# Altium PCB cube8.PcbDoc
Units mil, origin at the board's own origin, x right, y up, seen from the top; angles counter-clockwise.
Board outline 5240 x 7275 mil, 2 copper layers (Top Layer, Bottom Layer); 159 components, 180 nets, 530 pads, 5 vias.
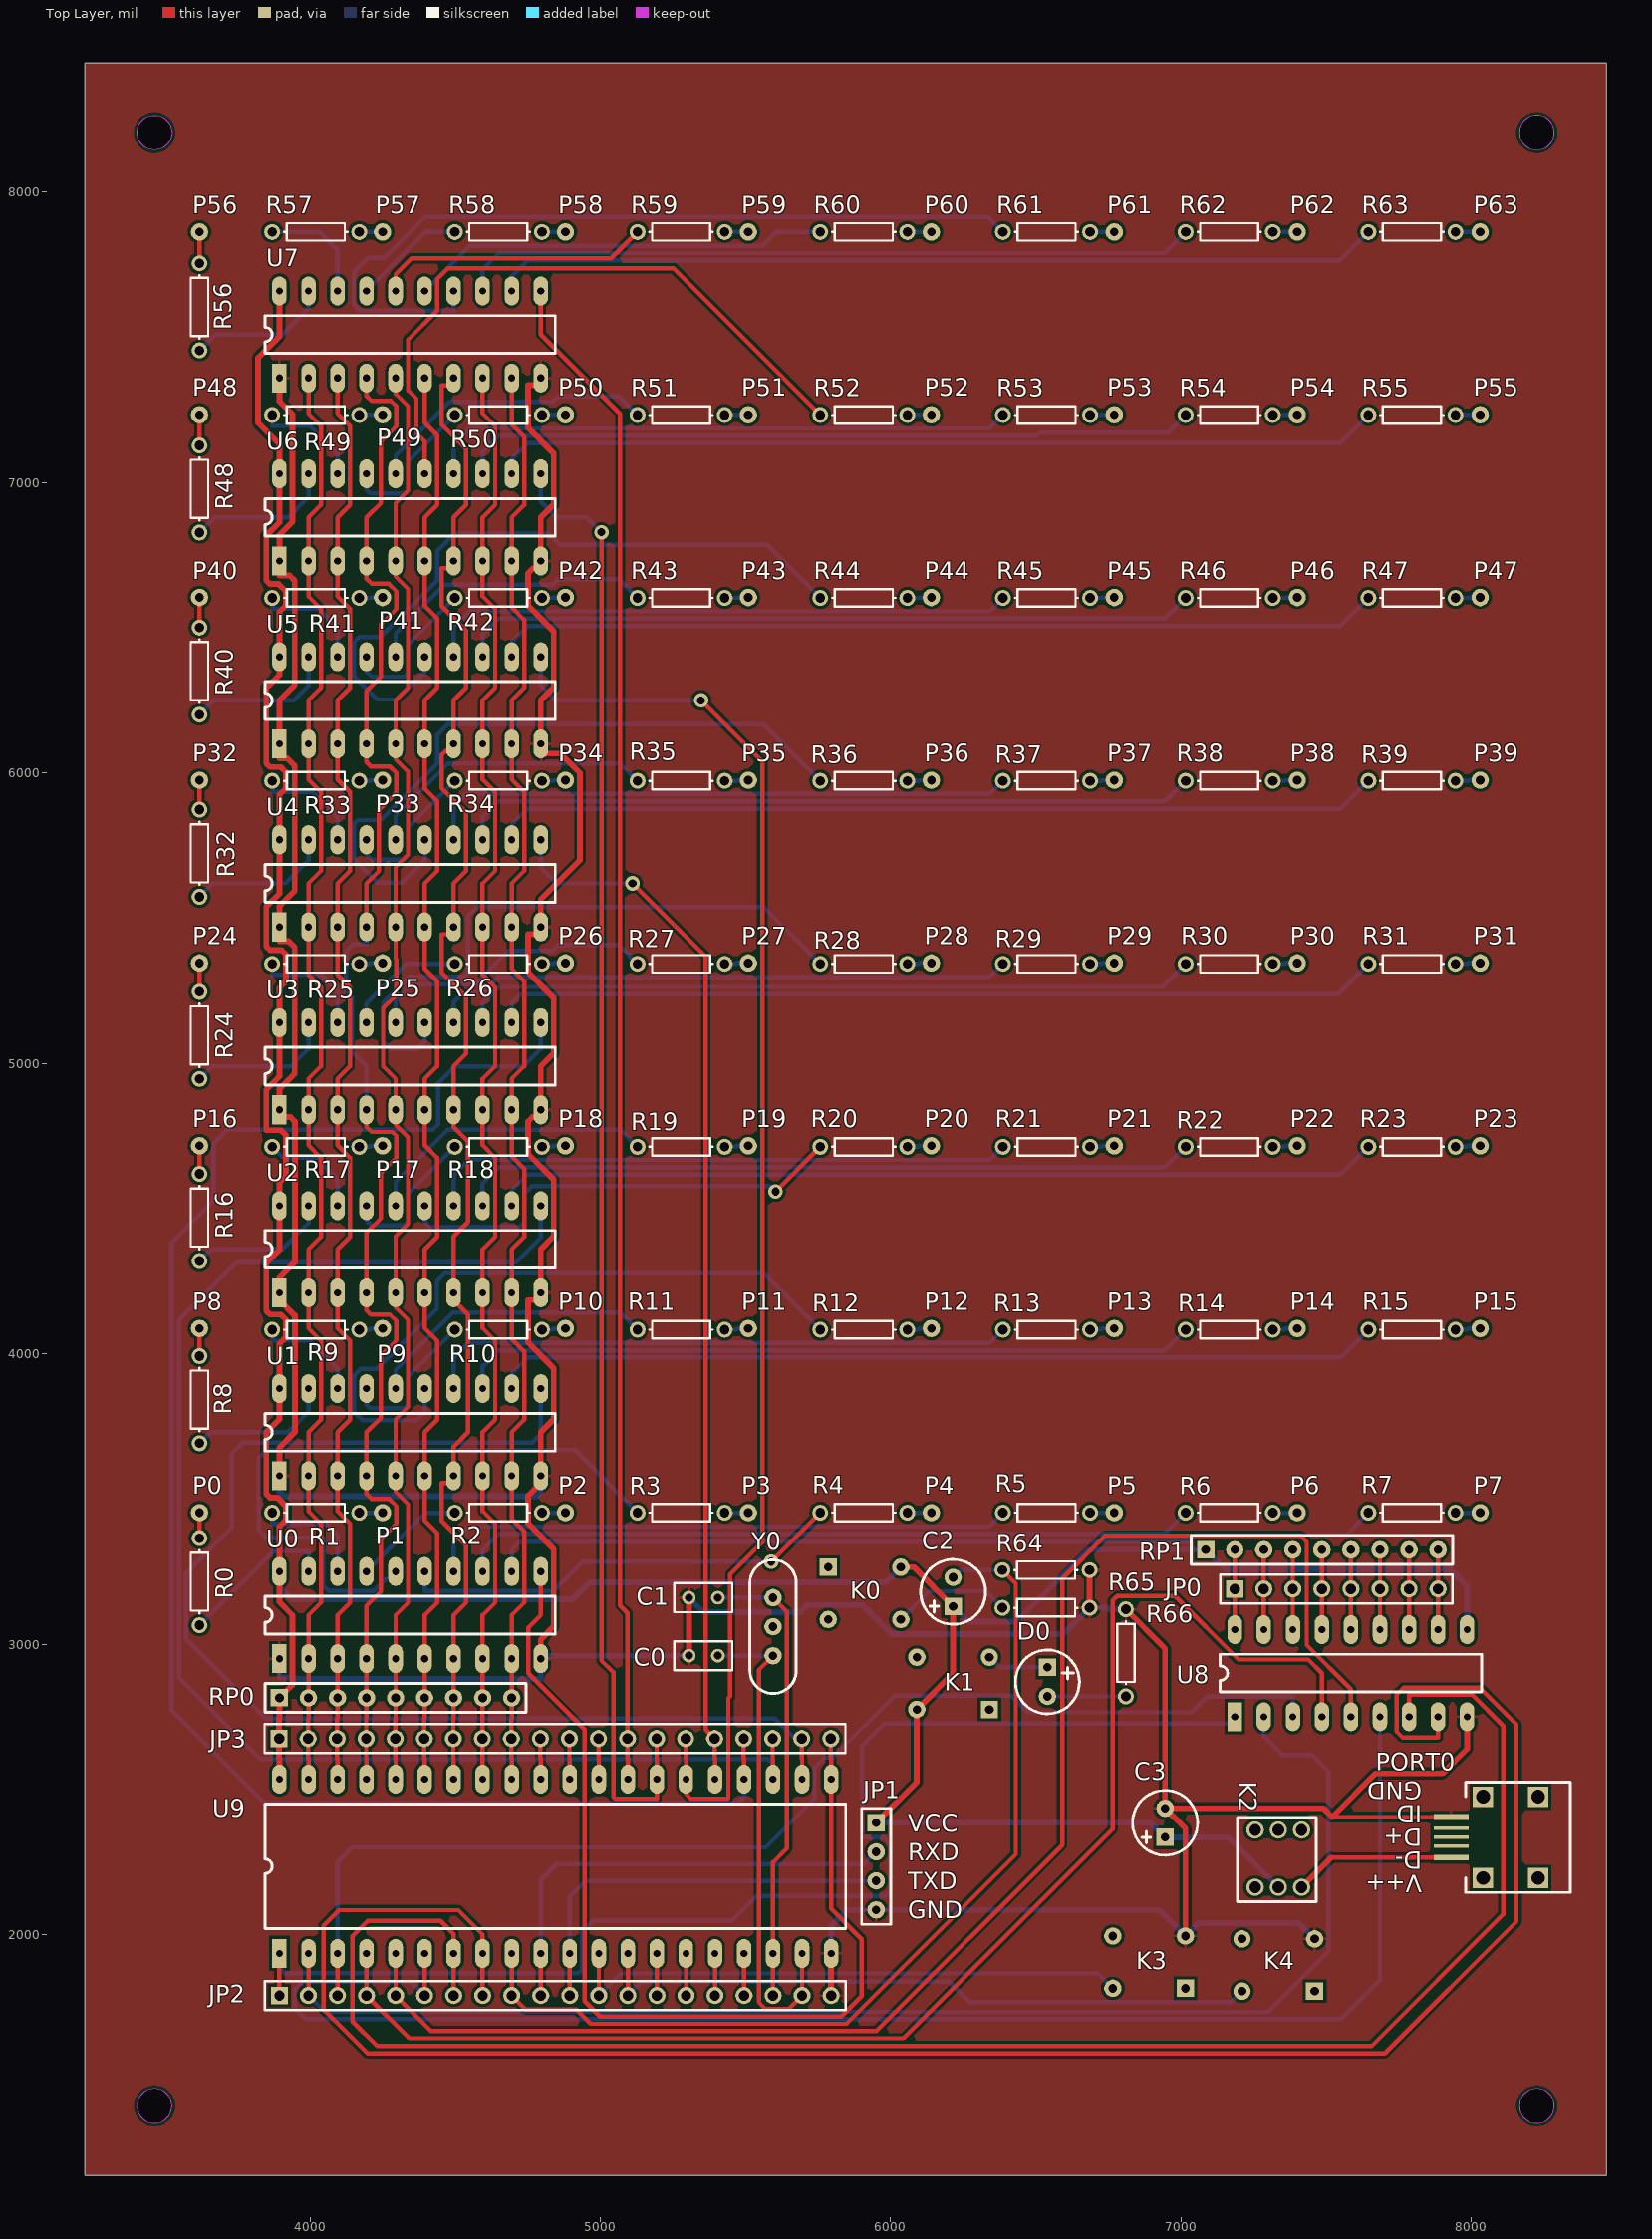
[diagram p0: Top Layer view]
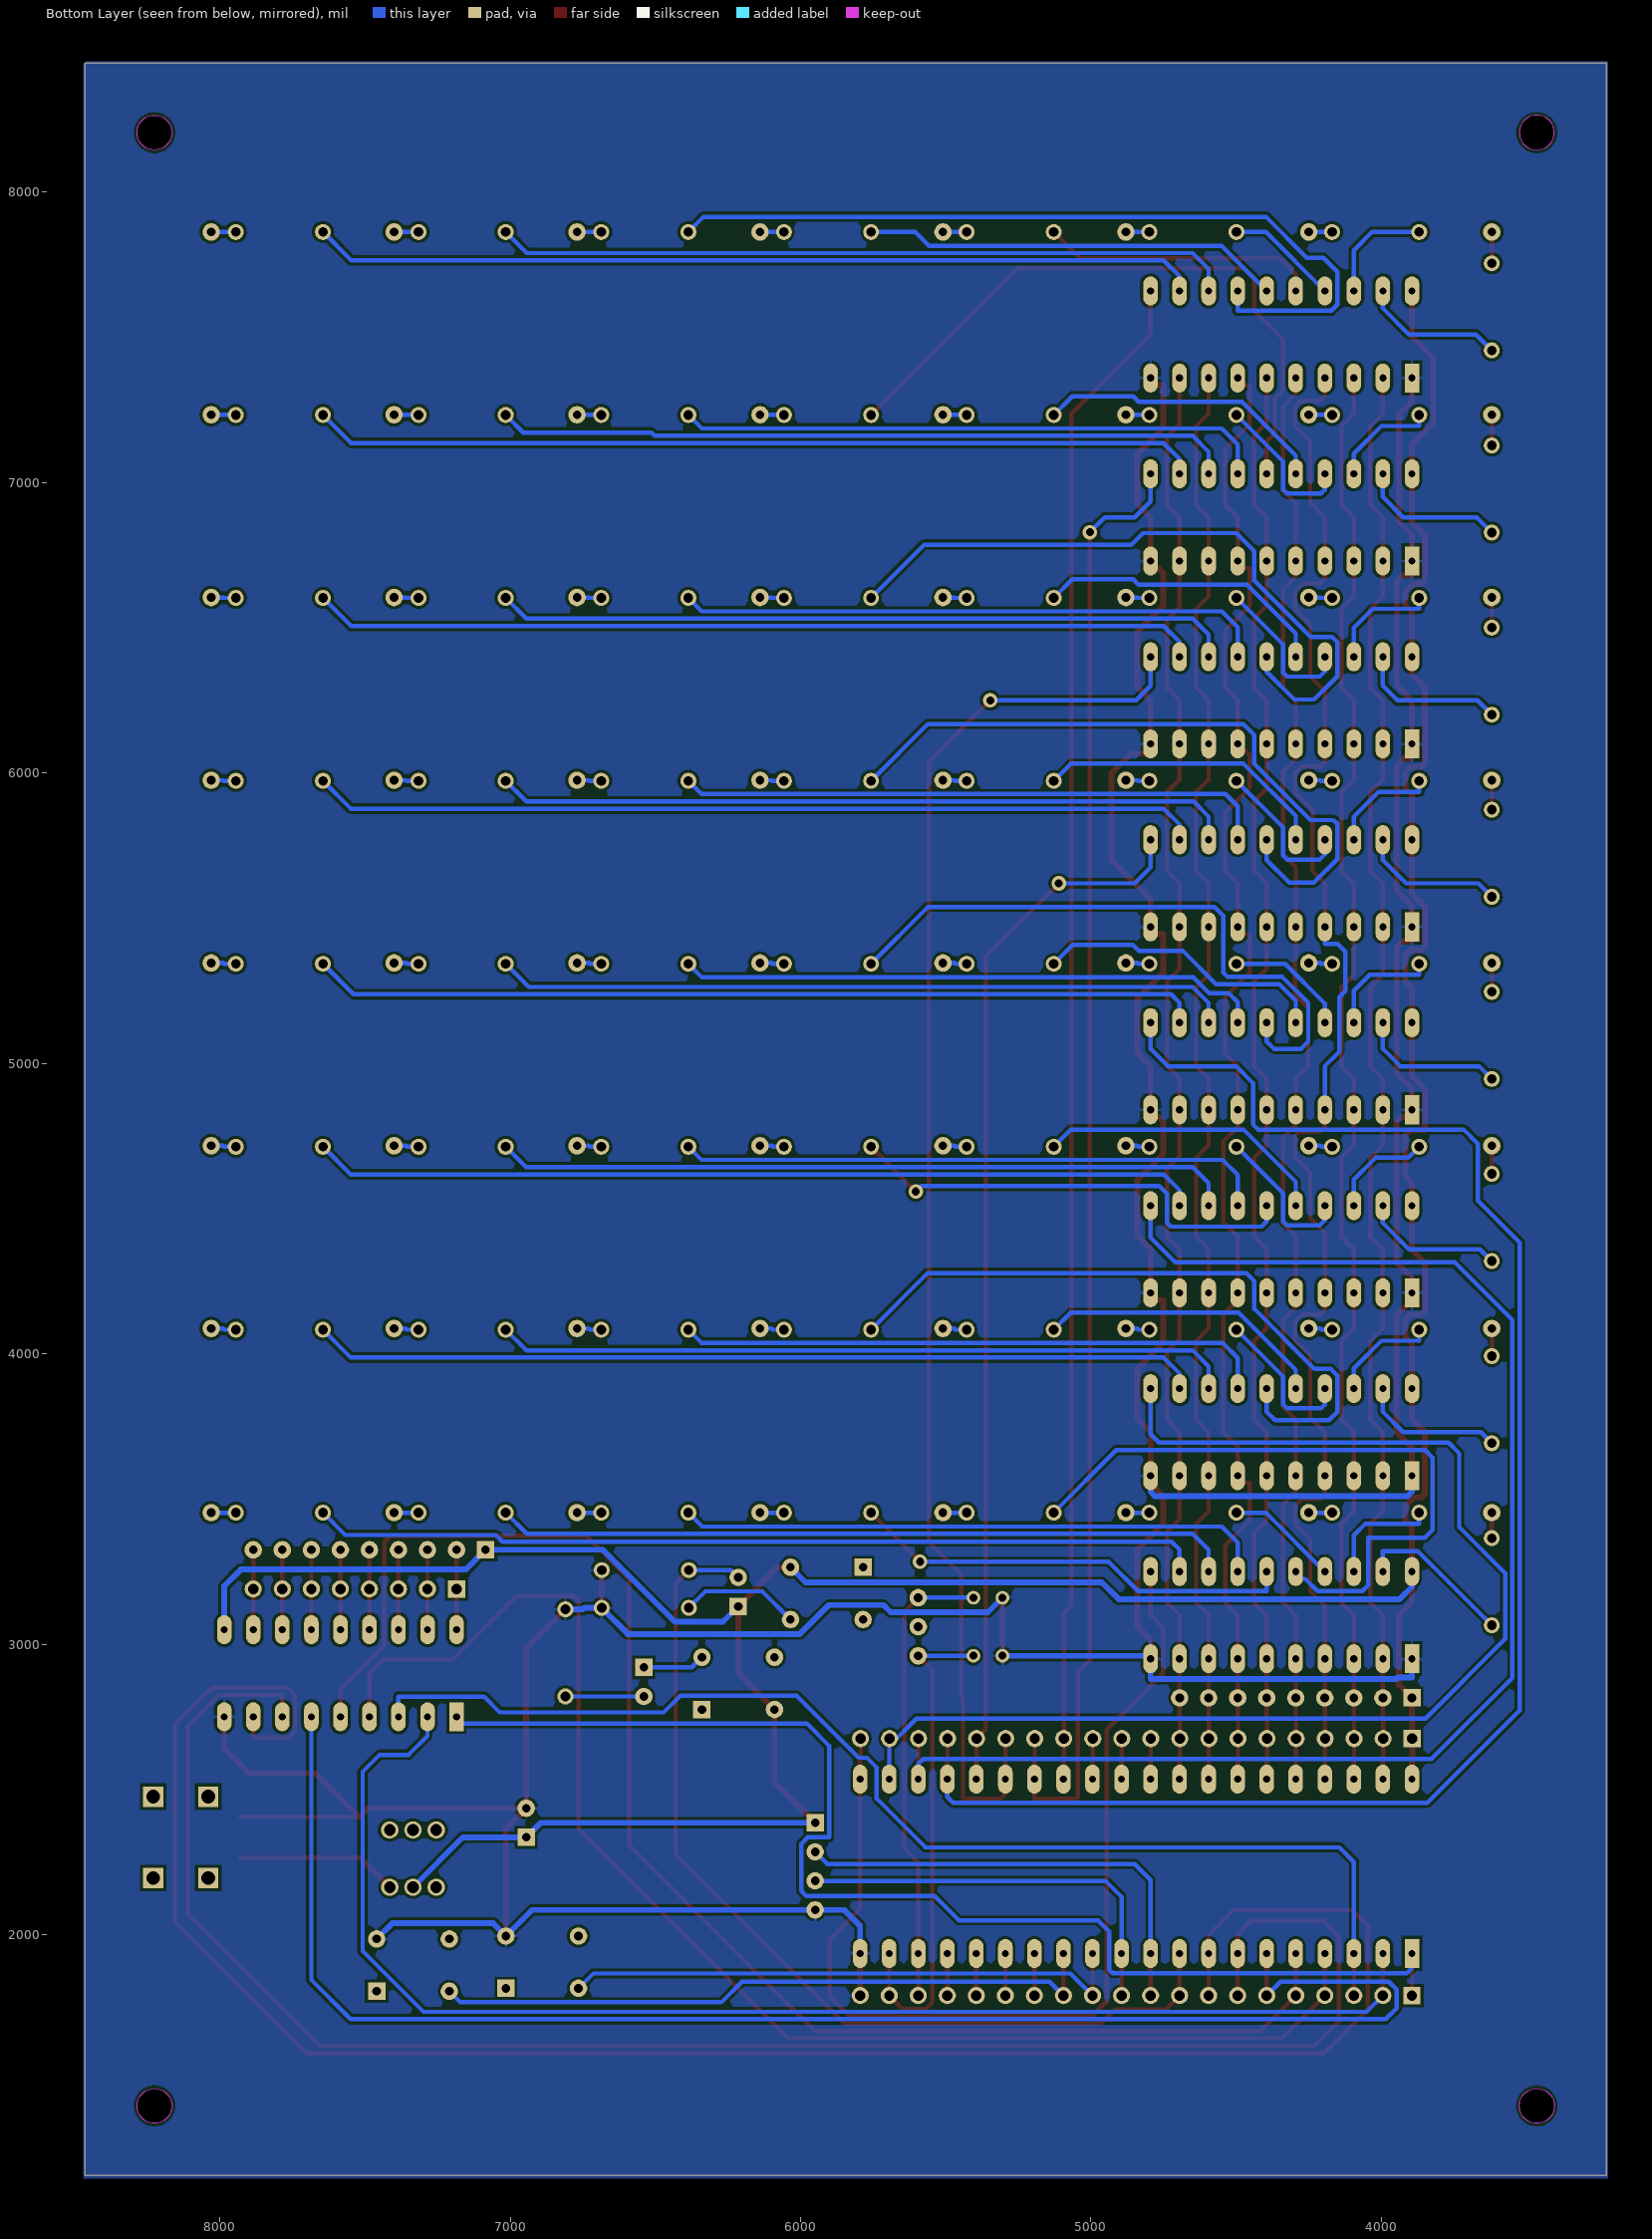
[diagram p1: Bottom Layer view, seen from below]

## Layer stack, top to bottom
Top Solder: solder mask 0.4, Solder Resist, Dk 3.5
Top Layer: signal copper 1.4
Dielectric 1: dielectric 12.6, FR-4, Dk 4.8
Bottom Layer: signal copper 1.4
Bottom Solder: solder mask 0.4, Solder Resist, Dk 3.5

## Board outline
3225,1170 3225,8445 8465,8445 8465,1170
cut-out: 8165,8205 ccw(c8225,8205) 8225,8145 ccw(c8225,8205) 8285,8205 ccw(c8225,8205) 8225,8265 ccw(c8225,8205)
cut-out: 3465,8145 cw(c3465,8205) 3405,8205 cw(c3465,8205) 3465,8265 cw(c3465,8205) 3525,8205 cw(c3465,8205)
cut-out: 3405,1410 ccw(c3465,1410) 3465,1350 ccw(c3465,1410) 3525,1410 ccw(c3465,1410) 3465,1470 ccw(c3465,1410)
cut-out: 8165,1410 ccw(c8225,1410) 8225,1350 ccw(c8225,1410) 8285,1410 ccw(c8225,1410) 8225,1470 ccw(c8225,1410)

## Design rules (kind name [scope] priority, off if disabled: settings)
Clearance Clearance_1 [All] p1: gap=10 ignorepadtopadclearanceinfootprint=FALSE
Clearance [All] p2: gap=10 ignorepadtopadclearanceinfootprint=FALSE except(0: Arc-Hole Track-Hole SMDPad-Hole THPad-Hole Via-Hole Fill-Hole Poly-Hole Region-Hole Text-Hole)
HoleSize [All] p1: absolutevalues=TRUE maxlimit=100 minlimit=10 maxpercent=80.000 minpercent=20.000
PolygonConnect [All] p1: connectstyle=Relief reliefconductorwidth=10 reliefentries=4 polygonreliefangle="90 Angle" airgapwidth=10
RoutingVias [All] p1: holewidth=28 width=50 viastyle="Through Hole" minholewidth=28 minwidth=50 maxholewidth=28 maxwidth=50
SMDNeckDown [All] p1: percent=75.000
SilkToSilkClearance [All] p1: silktosilkclearance=6
SilkToSolderMaskClearance [IsPad] p1: minsilkscreentomaskgap=6 clearancetoexposedcopper=TRUE
SolderMaskExpansion [All] p1: expansion=4
Width Width_1 [InNet('NetK2_1')] p1: maxlimit=20 minlimit=15 preferedwidth=20
Width VCC [InNet('VCC')] p2: maxlimit=20 minlimit=20 preferedwidth=20
Width GND [InNet('GND')] p3: maxlimit=20 minlimit=15 preferedwidth=20
Width [All] p4: maxlimit=15 minlimit=6 preferedwidth=15
27 further rules are at their usual default settings.

## Components (designator, comment, footprint, x,y, rotation, side; value= is the part's Value field where it differs from the comment)
C0 "Cap" RAD-0.1 5355,2960 r0 top value=30pF
C1 "Cap" RAD-0.1 5355,3160 r0 top value=30pF
C2 "Cap Pol1" RB.1 6215,3130 r180 top value=10uF
C3 "Cap Pol1" RB.1 6945,2335 r180 top value=10uF
D0 "LED-3MM" LED3 6540,2920 r0 top
JP0 "Header 8" HDR1X8 7185,3190 r0 top
JP1 "Header 4" PIN4 5950,2385 r0 top
JP2 "Header 20" HDR1X20 3895,1790 r0 top
JP3 "Header 20" HDR1X20 3893.94,2675 r0 top
K0 "TS1109" TS-1109 5785,3265 r0 top
K1 "TS1109" TS-1109 6340,2775 r180 top
K2 "KFT-7.0" KFT-7.0 7415,2163 r180 top
K3 "TS1109" TS-1109 7015,1815 r180 top
K4 "TS1109" TS-1109 7460,1805 r180 top
P0 "PIN" PIN1 3620,3452.86 r180 top
P1 "PIN" PIN1 4250,3452.86 r180 top
P2 "PIN" PIN1 4880,3452.86 r180 top
P3 "PIN" PIN1 5510,3452.86 r180 top
P4 "PIN" PIN1 6140,3452.86 r180 top
P5 "PIN" PIN1 6770,3452.86 r180 top
P6 "PIN" PIN1 7400,3452.86 r180 top
P7 "PIN" PIN1 8030,3452.86 r180 top
P8 "PIN" PIN1 3620,4087.14 r180 top
P9 "PIN" PIN1 4250,4087.14 r180 top
P10 "PIN" PIN1 4880,4087.14 r270 top
P11 "PIN" PIN1 5510,4087.14 r180 top
P12 "PIN" PIN1 6140,4087.14 r270 top
P13 "PIN" PIN1 6770,4087.14 r270 top
P14 "PIN" PIN1 7400,4087.14 r270 top
P15 "PIN" PIN1 8030,4087.14 r270 top
P16 "PIN" PIN1 3620,4716.43 r270 top
P17 "PIN" PIN1 4250,4716.43 r270 top
P18 "PIN" PIN1 4880,4716.43 r270 top
P19 "PIN" PIN1 5510,4716.43 r270 top
P20 "PIN" PIN1 6140,4716.43 r270 top
P21 "PIN" PIN1 6770,4716.43 r180 top
P22 "PIN" PIN1 7400,4716.43 r270 top
P23 "PIN" PIN1 8030,4716.43 r270 top
P24 "PIN" PIN1 3620,5345.71 r270 top
P25 "PIN" PIN1 4250,5345.71 r270 top
P26 "PIN" PIN1 4880,5345.71 r270 top
P27 "PIN" PIN1 5510,5345.71 r270 top
P28 "PIN" PIN1 6140,5345.71 r270 top
P29 "PIN" PIN1 6770,5345.71 r270 top
P30 "PIN" PIN1 7400,5345.71 r270 top
P31 "PIN" PIN1 8030,5345.71 r180 top
P32 "PIN" PIN1 3620,5975 r270 top
P33 "PIN" PIN1 4250,5975 r270 top
P34 "PIN" PIN1 4880,5975 r270 top
P35 "PIN" PIN1 5510,5975 r270 top
P36 "PIN" PIN1 6140,5975 r270 top
P37 "PIN" PIN1 6770,5975 r270 top
P38 "PIN" PIN1 7400,5975 r270 top
P39 "PIN" PIN1 8030,5975 r270 top
P40 "PIN" PIN1 3620,6604.29 r270 top
P41 "PIN" PIN1 4250,6604.29 r180 top
P42 "PIN" PIN1 4880,6604.29 r270 top
P43 "PIN" PIN1 5510,6604.29 r270 top
P44 "PIN" PIN1 6140,6604.29 r270 top
P45 "PIN" PIN1 6770,6604.29 r270 top
P46 "PIN" PIN1 7400,6604.29 r270 top
P47 "PIN" PIN1 8030,6604.29 r270 top
P48 "PIN" PIN1 3620,7233.57 r270 top
P49 "PIN" PIN1 4250,7233.57 r270 top
P50 "PIN" PIN1 4880,7233.57 r270 top
P51 "PIN" PIN1 5510,7233.57 r180 top
P52 "PIN" PIN1 6140,7233.57 r270 top
P53 "PIN" PIN1 6770,7233.57 r270 top
P54 "PIN" PIN1 7400,7233.57 r270 top
P55 "PIN" PIN1 8030,7233.57 r270 top
P56 "PIN" PIN1 3620,7862.86 r270 top
P57 "PIN" PIN1 4250,7862.86 r270 top
P58 "PIN" PIN1 4880,7862.86 r270 top
P59 "PIN" PIN1 5510,7862.86 r270 top
P60 "PIN" PIN1 6140,7862.86 r270 top
P61 "PIN" PIN1 6770,7862.86 r180 top
P62 "PIN" PIN1 7400,7862.86 r270 top
P63 "PIN" PIN1 8030,7862.86 r270 top
PORT0 "MINI-B" MINI-B 8230,2475 r270 top
R0 "Res1" AXIAL-0.3 3619.94,3215 r90 top value=100
R1 "Res1" AXIAL-0.3 4020,3452.79 r0 top value=100
R2 "Res1" AXIAL-0.3 4649.17,3452.79 r0 top value=100
R3 "Res1" AXIAL-0.3 5278.33,3452.79 r0 top value=100
R4 "Res1" AXIAL-0.3 5907.5,3452.79 r0 top value=100
R5 "Res1" AXIAL-0.3 6536.67,3452.79 r0 top value=100
R6 "Res1" AXIAL-0.3 7165.83,3452.79 r0 top value=100
R7 "Res1" AXIAL-0.3 7795,3452.79 r0 top value=100
R8 "Res1" AXIAL-0.3 3619.94,3842.14 r90 top value=100
R9 "Res1" AXIAL-0.3 4020,4082.81 r0 top value=100
R10 "Res1" AXIAL-0.3 4649.17,4082.81 r0 top value=100
R11 "Res1" AXIAL-0.3 5278.33,4082.81 r0 top value=100
R12 "Res1" AXIAL-0.3 5907.5,4082.81 r0 top value=100
R13 "Res1" AXIAL-0.3 6536.67,4082.81 r0 top value=100
R14 "Res1" AXIAL-0.3 7165.83,4082.81 r0 top value=100
R15 "Res1" AXIAL-0.3 7795,4082.81 r0 top value=100
R16 "Res1" AXIAL-0.3 3619.94,4469.29 r90 top value=100
R17 "Res1" AXIAL-0.3 4020,4712.83 r0 top value=100
R18 "Res1" AXIAL-0.3 4649.17,4712.83 r0 top value=100
R19 "Res1" AXIAL-0.3 5278.33,4712.83 r0 top value=100
R20 "Res1" AXIAL-0.3 5907.5,4712.83 r0 top value=100
R21 "Res1" AXIAL-0.3 6536.67,4712.83 r0 top value=100
R22 "Res1" AXIAL-0.3 7165.83,4712.83 r0 top value=100
R23 "Res1" AXIAL-0.3 7795,4712.83 r0 top value=100
R24 "Res1" AXIAL-0.3 3619.94,5096.43 r90 top value=100
R25 "Res1" AXIAL-0.3 4020,5342.85 r0 top value=100
R26 "Res1" AXIAL-0.3 4649.17,5342.85 r0 top value=100
R27 "Res1" AXIAL-0.3 5278.33,5342.85 r0 top value=100
R28 "Res1" AXIAL-0.3 5907.5,5342.85 r0 top value=100
R29 "Res1" AXIAL-0.3 6536.67,5342.85 r0 top value=100
R30 "Res1" AXIAL-0.3 7165.83,5342.85 r0 top value=100
R31 "Res1" AXIAL-0.3 7795,5342.85 r0 top value=100
R32 "Res1" AXIAL-0.3 3619.94,5723.57 r90 top value=100
R33 "Res1" AXIAL-0.3 4020,5972.87 r0 top value=100
R34 "Res1" AXIAL-0.3 4649.17,5972.87 r0 top value=100
R35 "Res1" AXIAL-0.3 5278.33,5972.87 r0 top value=100
R36 "Res1" AXIAL-0.3 5907.5,5972.87 r0 top value=100
R37 "Res1" AXIAL-0.3 6536.67,5972.87 r0 top value=100
R38 "Res1" AXIAL-0.3 7165.83,5972.87 r0 top value=100
R39 "Res1" AXIAL-0.3 7795,5972.87 r0 top value=100
R40 "Res1" AXIAL-0.3 3619.94,6350.71 r90 top value=100
R41 "Res1" AXIAL-0.3 4020,6602.88 r0 top value=100
R42 "Res1" AXIAL-0.3 4649.17,6602.88 r0 top value=100
R43 "Res1" AXIAL-0.3 5278.33,6602.88 r0 top value=100
R44 "Res1" AXIAL-0.3 5907.5,6602.88 r0 top value=100
R45 "Res1" AXIAL-0.3 6536.67,6602.88 r0 top value=100
R46 "Res1" AXIAL-0.3 7165.83,6602.88 r0 top value=100
R47 "Res1" AXIAL-0.3 7795,6602.88 r0 top value=100
R48 "Res1" AXIAL-0.3 3619.94,6977.86 r90 top value=100
R49 "Res1" AXIAL-0.3 4020,7232.9 r0 top value=100
R50 "Res1" AXIAL-0.3 4649.17,7232.9 r0 top value=100
R51 "Res1" AXIAL-0.3 5278.33,7232.9 r0 top value=100
R52 "Res1" AXIAL-0.3 5907.5,7232.9 r0 top value=100
R53 "Res1" AXIAL-0.3 6536.67,7232.9 r0 top value=100
R54 "Res1" AXIAL-0.3 7165.83,7232.9 r0 top value=100
R55 "Res1" AXIAL-0.3 7795,7232.9 r0 top value=100
R56 "Res1" AXIAL-0.3 3619.94,7605 r90 top value=100
R57 "Res1" AXIAL-0.3 4020,7862.92 r0 top value=100
R58 "Res1" AXIAL-0.3 4649.17,7862.92 r0 top value=100
R59 "Res1" AXIAL-0.3 5278.33,7862.92 r0 top value=100
R60 "Res1" AXIAL-0.3 5907.5,7862.92 r0 top value=100
R61 "Res1" AXIAL-0.3 6536.67,7862.92 r0 top value=100
R62 "Res1" AXIAL-0.3 7165.83,7862.92 r0 top value=100
R63 "Res1" AXIAL-0.3 7795,7862.92 r0 top value=100
R64 "Res1" AXIAL-0.3 6535,3255 r180 top value=10K
R65 "Res1" AXIAL-0.3 6535,3125 r180 top value=100
R66 "Res1" AXIAL-0.3 6810,2970 r90 top value=1K
RP0 "RESPACK8" SIP9 3895,2815 r90 top value=10K
RP1 "RESPACK8" SIP9 7085,3325 r90 top value=10K
U0 "74HC573" DIP20 3895,2950 r90 top
U1 "74HC573" DIP20 3895,3580 r90 top
U2 "74HC573" DIP20 3895,4210 r90 top
U3 "74HC573" DIP20 3895,4840 r90 top
U4 "74HC573" DIP20 3895,5470 r90 top
U5 "74HC573" DIP20 3895,6100 r90 top
U6 "74HC573" DIP20 3895,6730 r90 top
U7 "74HC573" DIP20 3895,7360 r90 top
U8 "ULN2803APG" DIP18 7185,2750 r90 top
U9 "STC89C52RC" DIP40 3895,1935 r90 top
Y0 "XTAL" HC-49S 5595,3160 r0 top

## Footprints (in the part's own frame and the unit in brackets; to place one, negate y for a bottom-side part, rotate by r counter-clockwise, add the part's x,y. Pads: shape width x height; smd on the part's side, far side on the other; paste and mask are expansions set on the pad)
AXIAL-0.3 [mm] "Axial Device, Thru-Hole; 2 Leads; 0.3 in Pin Spacing"
  round 1.4 hole 0.85: 1(-3.81,0) 2(3.81,0)
  silkscreen extent -2.77,-0.76 2.77,0.76
DIP18 [mil]
  rect 100x50 hole 25: 1(0,0)
  oval 100x50 hole 25: 2(0,-100) 3(0,-200) 4(0,-300) 5(0,-400) 6(0,-500) 7(0,-600) 8(0,-700) 9(0,-800) 10(300,-800) 11(300,-700) 12(300,-600) 13(300,-500) 14(300,-400) 15(300,-300) 16(300,-200) 17(300,-100) 18(300,0)
  silkscreen extent 85,-850 215,50
DIP20 [mil]
  rect 100x50 hole 25: 1(0,0)
  oval 100x50 hole 25: 2(0,-100) 3(0,-200) 4(0,-300) 5(0,-400) 6(0,-500) 7(0,-600) 8(0,-700) 9(0,-800) 10(0,-900) 11(300,-900) 12(300,-800) 13(300,-700) 14(300,-600) 15(300,-500) 16(300,-400) 17(300,-300) 18(300,-200) 19(300,-100) 20(300,0)
  silkscreen extent 85,-950 215,50
DIP40 [mil]
  rect 100x50 hole 25: 1(0,0)
  oval 100x50 hole 25: 2(0,-100) 3(0,-200) 4(0,-300) 5(0,-400) 6(0,-500) 7(0,-600) 8(0,-700) 9(0,-800) 10(0,-900) 11(0,-1000) 12(0,-1100) 13(0,-1200) 14(0,-1300) 15(0,-1400) 16(0,-1500) 17(0,-1600) 18(0,-1700) 19(0,-1800) 20(0,-1900) 21(600,-1900) 22(600,-1800) 23(600,-1700) 24(600,-1600) 25(600,-1500) 26(600,-1400) 27(600,-1300) 28(600,-1200) 29(600,-1100) 30(600,-1000) 31(600,-900) 32(600,-800) 33(600,-700) 34(600,-600) 35(600,-500) 36(600,-400) 37(600,-300) 38(600,-200) 39(600,-100) 40(600,0)
  silkscreen extent 85,-1950 515,50
HC-49S [mil]
  round 60 hole 30: 0(0,-100) 1(0,0) 2(0,-200)
  silkscreen extent -80,-330 80,130
HDR1X8 [mm] "Connector; Header; 8 Position"
  rect 1.5x1.5 hole 0.9: 1(0,0)
  round 1.5 hole 0.9: 2(2.54,0) 3(5.08,0) 4(7.62,0) 5(10.16,0) 6(12.7,0) 7(15.24,0) 8(17.78,0)
  silkscreen extent -1.27,-1.27 19.05,1.27
HDR1X20 [mm] "Connector; Header; 20 Position"
  rect 1.5x1.5 hole 0.9: 1(0,0)
  round 1.5 hole 0.9: 2(2.54,0) 3(5.08,0) 4(7.62,0) 5(10.16,0) 6(12.7,0) 7(15.24,0) 8(17.78,0) 9(20.32,0) 10(22.86,0) 11(25.4,0) 12(27.94,0) 13(30.48,0) 14(33.02,0) 15(35.56,0) 16(38.1,0) 17(40.64,0) 18(43.18,0) 19(45.72,0) 20(48.26,0)
  silkscreen extent -1.27,-1.27 49.53,1.27
KFT-7.0 [mil]
  round 60 hole 40: 1(0,0) 2(80,0) 3(160,0) 4(160,-197) 5(80,-197) 6(0,-197)
  silkscreen extent -50,-240 220,50
LED3 [mil]
  rect 60x60 hole 30: 1(0,0)
  round 60 hole 30: 2(0,-100)
  silkscreen extent -110,-160 110,60
MINI-B [mil]
  rect 70x70 hole 47: 0(0,0) 0(0,-190) 0(280,0) 0(280,-190)
  rect 20x120 smd: 1(210,-300) 5(70,-300)
  rect 12x120 smd: 2(171,-300) 3(140,-300) 4(109,-300)
  silkscreen extent -50,-250 330,110
PIN1 [mil]
  round 60 hole 30: 0(0,0)
PIN4 [mil]
  rect 60x60 hole 30: 1(0,0)
  round 60 hole 30: 2(0,-100) 3(0,-200) 4(0,-300)
  silkscreen extent -50,-350 50,50
RAD-0.1 [mm] "Radial Cap, Thru-Hole; 2 Leads; 0.1 in Pin Spacing"
  round 1.2 hole 0.7: 1(-1.27,0) 2(1.27,0)
  silkscreen extent -2.54,-1.27 2.54,1.27
RB.1 [mil]
  rect 60x60 hole 30: 1(0,0)
  round 60 hole 30: 2(0,-100)
  silkscreen extent -112,-162 112,62
SIP9 [mil]
  rect 60x60 hole 30: 0(0,0)
  round 60 hole 30: 1(0,-100) 2(0,-200) 3(0,-300) 4(0,-400) 5(0,-500) 6(0,-600) 7(0,-700) 8(0,-800)
  silkscreen extent -50,-850 50,50
TS-1109 [mil]
  rect 60x60 hole 30: A(0,0)
  round 60 hole 30: B(0,-180) C(250,0) D(250,-180)

## Part data
C0 C1: "Capacitor", LatestRevisionDate=17-Jul-2002, LatestRevisionNote="Re-released for DXP Platform.", PackageDescription="Radial Cap, Thru-Hole; 2 Leads; 0.3 in Pin Spacing", PackageReference=RAD-0.3, Published=8-Jun-2000, Publisher="Altium Limited"
C2 C3: "Polarized Capacitor (Radial)", LatestRevisionDate=17-Jul-2002, LatestRevisionNote="Re-released for DXP Platform.", PackageDescription="Polarized Capacitor (Radial); 2 Leads", PackageReference=RB7.6-15, Published=8-Jun-2000, Publisher="Altium Limited"
D0: library part LED0, "Typical INFRARED GaAs LED", LatestRevisionDate=08-Jul-2005, LatestRevisionNote="Mech Layer 1 removed.", PackageDescription="LED; 2 Leads", PackageReference=LED-0, Published=8-Jun-2000, Publisher="Altium Limited"
JP0: "Header, 8-Pin", LatestRevisionDate=17-Jul-2002, LatestRevisionNote="Re-released for DXP Platform.", Publisher="Altium Limited"
JP1: "Header, 4-Pin", LatestRevisionDate=17-Jul-2002, LatestRevisionNote="Re-released for DXP Platform.", Publisher="Altium Limited"
JP2 JP3: "Header, 20-Pin", LatestRevisionDate=17-Jul-2002, LatestRevisionNote="Re-released for DXP Platform.", Publisher="Altium Limited"
K0 K1 K3 K4: library part TS-1109
P0 P1 P2 P3 P4 P5 P6 P7 P8 P9 P10 P11 P12 P13 P14 P15 P16 P17 P18 P19 P20 P21 P22 P23 P24 P25 P26 P27 P28 P29 P30 P31 P32 P33 P34 P35 P36 P37 P38 P39 P40 P41 P42 P43 P44 P45 P46 P47 P48 P49 P50 P51 P52 P53 P54 P55 P56 P57 P58 P59 P60 P61 P62 P63: library part PIN1
R0 R1 R2 R3 R4 R5 R6 R7 R8 R9 R10 R11 R12 R13 R14 R15 R16 R17 R18 R19 R20 R21 R22 R23 R24 R25 R26 R27 R28 R29 R30 R31 R32 R33 R34 R35 R36 R37 R38 R39 R40 R41 R42 R43 R44 R45 R46 R47 R48 R49 R50 R51 R52 R53 R54 R55 R56 R57 R58 R59 R60 R61 R62 R63 R64 R65 R66: "Resistor", LatestRevisionDate=17-Jul-2002, LatestRevisionNote="Re-released for DXP Platform.", PackageDescription="Axial Device, Thru-Hole; 2 Leads; 0.3 in Pin Spacing", PackageReference=AXIAL-0.3, Published=8-Jun-2000, Publisher="Altium Limited"
Y0: "Crystal Oscillator", LatestRevisionDate=17-Jul-2002, LatestRevisionNote="Re-released for DXP Platform.", PackageDescription="Crystal, Thru-Hole; 2 Leads; Body 3.1 x 8.2 mm (Dia.xH)", PackageReference=R38, Published=8-Jun-2000, Publisher="Altium Limited"

## Via types
v1: diameter 50, hole 28, Top Layer to Bottom Layer, 5 vias

## Nets (pads, with @x,y where several pads share a name; then routed paths per layer and width w, separated by ;. In a path a pad name is that pad's centre, name@x,y a point inside that pad or via, vN(x,y) a via of type N, cw(c..) or ccw(c..) an arc to the next point about the centre after c; other vN are vias at no path point)
GND: C0.1 C1.1 C3.2 JP1.4 JP2.20 K3.B K4.B PORT0.5 R64.1 R65.1 R66.2 U0.1 U0.10 U1.1 U1.10 U2.1 U2.10 U3.1 U3.10 U4.1 U4.10 U5.1 U5.10 U6.1 U6.10 U7.1 U7.10 U8.9 U9.20 | length 18637.7
  Top Layer w15: 7520,2405 PORT0.5
  Top Layer w20: U1.1 3895,3677 3948,3730 3948,4132 3895,4185 U2.1 3895,4262 3948,4315 3948,4800 3933,4815 3895,4815 U3.1 3895,4912 3947.56,4964.56 3947.56,5400 3927.15,5420.41 3895,5420.41 U4.1 3895,5542 3947.56,5594.56 3947.56,6025 3922.13,6050.43 3895,6050.43 U5.1 3895,6250 3947.56,6302.56 3947.56,6662.5 3929.62,6680.44 3895,6680.44 U6.1 3895,6820 3940,6865 3940,7235 3895,7280 U7.1 ; U0.10 4795,3016 4840,3061 4840,3327 4751,3416 4751,3511 4795,3555 U1.10 4795,3730 4840,3775 4840,3950 4751,4039 4751,4185 4795,4185 U2.10 4795,4360 4840,4405 4840,4600 4751.61,4688.39 4751.61,4800 4766.61,4815 4795,4815 U3.10 4795,4990 4840,5035 4840,5224.5 4751,5313.5 4751,5445 4795,5445 U4.10 4795,5565 4930,5700 4930,6000 4863,6067 4795,6067 U5.10 4795,6250 4840,6295 4840,6487 4751,6576 4751,6687.5 4768.5,6705 4795,6705 U6.10 4795,6880 4840,6925 4840,7100 4751,7189 4751,7335 4795,7335 U7.10 ; C0.1 C1.1 ; JP2.20 U9.20 ; R65.1 R64.1 ; R66.2 6945,2985 C3.2 ; K3.B 7015,2365 C3.2 ; U8.9 7985,2640 7900,2555 7670,2555 7520,2405 7490,2435 C3.2
  Bottom Layer w20: U0.1 3895,2885 3945,2885 3950,2880 4795,2880 U0.10 4795,2960 C0.1 ; U1.1 3895,3525 3910,3510 4780,3510 4795,3525 U1.10 ; C1.1 5355,3110 5690,3110 5715,3135 5903,3135 6003,3035 6595,3035 R65.1 6745,3125 6750,3120 R66.2 ; U9.20 5795,2030 5850,2085 JP1.4 6925,2085 K3.B 7059,2039 7406,2039 K4.B
INT0: JP2.12 K3.C U9.12 | length 1967.6
  Top Layer w15: JP2.12 U9.12
  Bottom Layer w15: JP2.12 5071,1866 6714,1866 K3.C
INT1: JP2.13 K4.C U9.13 | length 2325
  Top Layer w15: JP2.13 U9.13
  Bottom Layer w15: JP2.13 5143,1838 6202,1838 6273,1767 7172,1767 K4.C
NetD0_1: D0.1 K1.B | length 214.5
  Bottom Layer w15: K1.B 6375,2920 D0.1
NetD0_2: D0.2 R66.1 | length 270
  Bottom Layer w15: D0.2 R66.1
NetJP0_1: JP0.1 RP1.1 U8.18 | length 275
  Top Layer w15: U8.18 JP0.1 RP1.1
NetJP0_2: JP0.2 RP1.2 U8.17 | length 275
  Top Layer w15: U8.17 JP0.2 RP1.2
NetJP0_3: JP0.3 RP1.3 U8.16 | length 275
  Top Layer w15: U8.16 JP0.3 RP1.3
NetJP0_4: JP0.4 RP1.4 U8.15 | length 275
  Top Layer w15: U8.15 JP0.4 RP1.4
NetJP0_5: JP0.5 RP1.5 U8.14 | length 275
  Top Layer w15: U8.14 JP0.5 RP1.5
NetJP0_6: JP0.6 RP1.6 U8.13 | length 275
  Top Layer w15: U8.13 JP0.6 RP1.6
NetJP0_7: JP0.7 RP1.7 U8.12 | length 275
  Top Layer w15: U8.12 JP0.7 RP1.7
NetJP0_8: JP0.8 RP1.8 U8.11 | length 275
  Top Layer w15: U8.11 JP0.8 RP1.8
NetJP2_14: JP2.14 U9.14 | length 145
  Top Layer w15: JP2.14 U9.14
NetJP2_15: JP2.15 U9.15 | length 145
  Top Layer w15: JP2.15 U9.15
NetJP2_16: JP2.16 U9.16 | length 145
  Top Layer w15: JP2.16 U9.16
NetJP2_17: JP2.17 U9.17 | length 145
  Top Layer w15: JP2.17 U9.17
NetJP3_10: JP3.10 U9.31 | length 140.4
  Top Layer w15: JP3.10 4793.94,2605.06 4795,2604 U9.31
NetJP3_11: JP3.11 U9.30 | length 140.4
  Top Layer w15: JP3.11 4893.94,2605.06 4895,2604 U9.30
NetJP3_12: JP3.12 U9.29 | length 140.4
  Top Layer w15: JP3.12 4993.94,2605.06 4995,2604 U9.29
NetK0_D: K0.D R65.2 | length 413.8
  Bottom Layer w15: K0.D 6132,3182 6328,3182 R65.2
NetK2_1: K2.1 PORT0.1 | length 557.2
  Top Layer w15: 7517,2265 PORT0.1
  Top Layer w20: K2.1 7517,2265
NetP0_0: P0.0 R0.2 | length 87.9
  Top Layer w15: R0.2 3619.94,3408 3620,3408.06 P0.0
NetP1_0: P1.0 R1.2 | length 80
  Bottom Layer w15: R1.2 4209,3452.79 4209.06,3452.86 P1.0
NetP2_0: P2.0 R2.2 | length 80.9
  Bottom Layer w15: R2.2 4839,3452.79 4839.06,3452.86 P2.0
NetP3_0: P3.0 R3.2 | length 81.7
  Bottom Layer w15: R3.2 5469,3452.79 5469.06,3452.86 P3.0
NetP4_0: P4.0 R4.2 | length 82.5
  Bottom Layer w15: R4.2 6098,3452.79 6098.06,3452.86 P4.0
NetP5_0: P5.0 R5.2 | length 83.4
  Bottom Layer w15: R5.2 6728,3452.79 6728.06,3452.86 P5.0
NetP6_0: P6.0 R6.2 | length 84.2
  Bottom Layer w15: R6.2 7357,3452.79 7357.06,3452.86 P6.0
NetP7_0: P7.0 R7.2 | length 85
  Bottom Layer w15: R7.2 7987,3452.79 7987.06,3452.86 P7.0
NetP8_0: P8.0 R8.2 | length 95
  Top Layer w15: R8.2 3619.94,4039 3620,4039.06 P8.0
NetP9_0: P9.0 R9.2 | length 81.8
  Bottom Layer w15: R9.2 4207,4082.81 4211.33,4087.14 P9.0
NetP10_0: P10.0 R10.2 | length 82.6
  Bottom Layer w15: R10.2 4837,4082.81 4841.33,4087.14 P10.0
NetP11_0: P11.0 R11.2 | length 83.5
  Bottom Layer w15: R11.2 5467,4082.81 5471.33,4087.14 P11.0
NetP12_0: P12.0 R12.2 | length 84.3
  Bottom Layer w15: R12.2 6096,4082.81 6100.33,4087.14 P12.0
NetP13_0: P13.0 R13.2 | length 85.1
  Bottom Layer w15: R13.2 6726,4082.81 6730.33,4087.14 P13.0
NetP14_0: P14.0 R14.2 | length 86
  Bottom Layer w15: R14.2 7355,4082.81 7359.33,4087.14 P14.0
NetP15_0: P15.0 R15.2 | length 86.8
  Bottom Layer w15: R15.2 7985,4082.81 7989.33,4087.14 P15.0
NetP16_0: P16.0 R16.2 | length 97.2
  Top Layer w15: R16.2 3619.94,4667 3620,4667.06 P16.0
NetP17_0: P17.0 R17.2 | length 81.5
  Bottom Layer w15: R17.2 4208,4712.83 4211.6,4716.43 P17.0
NetP18_0: P18.0 R18.2 | length 82.3
  Bottom Layer w15: R18.2 4837,4712.83 4840.6,4716.43 P18.0
NetP19_0: P19.0 R19.2 | length 83.2
  Bottom Layer w15: R19.2 5467,4712.83 5470.6,4716.43 P19.0
NetP20_0: P20.0 R20.2 | length 84
  Bottom Layer w15: R20.2 6096,4712.83 6099.6,4716.43 P20.0
NetP21_0: P21.0 R21.2 | length 84.8
  Bottom Layer w15: R21.2 6726,4712.83 6729.6,4716.43 P21.0
NetP22_0: P22.0 R22.2 | length 85.7
  Bottom Layer w15: R22.2 7356,4712.83 7359.6,4716.43 P22.0
NetP23_0: P23.0 R23.2 | length 86.5
  Bottom Layer w15: R23.2 7985,4712.83 7988.6,4716.43 P23.0
NetP24_0: P24.0 R24.2 | length 99.3
  Top Layer w15: R24.2 3619.94,5296 3620,5296.06 P24.0
NetP25_0: P25.0 R25.2 | length 81.2
  Bottom Layer w15: R25.2 4208,5342.85 4210.87,5345.71 P25.0
NetP26_0: P26.0 R26.2 | length 82
  Bottom Layer w15: R26.2 4838,5342.85 4840.87,5345.71 P26.0
NetP27_0: P27.0 R27.2 | length 82.9
  Bottom Layer w15: R27.2 5467,5342.85 5469.87,5345.71 P27.0
NetP28_0: P28.0 R28.2 | length 83.7
  Bottom Layer w15: R28.2 6097,5342.85 6099.87,5345.71 P28.0
NetP29_0: P29.0 R29.2 | length 84.5
  Bottom Layer w15: R29.2 6726,5342.85 6728.87,5345.71 P29.0
NetP30_0: P30.0 R30.2 | length 85.4
  Bottom Layer w15: R30.2 7356,5342.85 7358.87,5345.71 P30.0
NetP31_0: P31.0 R31.2 | length 86.2
  Bottom Layer w15: R31.2 7986,5342.85 7988.87,5345.71 P31.0
NetP32_0: P32.0 R32.2 | length 101.5
  Top Layer w15: R32.2 3619.94,5924 3620,5924.06 P32.0
NetP33_0: P33.0 R33.2 | length 80.9
  Bottom Layer w15: R33.2 4208,5972.87 4210.13,5975 P33.0
NetP34_0: P34.0 R34.2 | length 81.7
  Bottom Layer w15: R34.2 4838,5972.87 4840.13,5975 P34.0
NetP35_0: P35.0 R35.2 | length 82.5
  Bottom Layer w15: R35.2 5468,5972.87 5470.13,5975 P35.0
NetP36_0: P36.0 R36.2 | length 83.4
  Bottom Layer w15: R36.2 6097,5972.87 6099.13,5975 P36.0
NetP37_0: P37.0 R37.2 | length 84.2
  Bottom Layer w15: R37.2 6727,5972.87 6729.13,5975 P37.0
NetP38_0: P38.0 R38.2 | length 85
  Bottom Layer w15: R38.2 7356,5972.87 7358.13,5975 P38.0
NetP39_0: P39.0 R39.2 | length 85.9
  Bottom Layer w15: R39.2 7986,5972.87 7988.13,5975 P39.0
NetP40_0: P40.0 R40.2 | length 103.6
  Top Layer w15: R40.2 3619.94,6552 3620,6552.06 P40.0
NetP41_0: P41.0 R41.2 | length 80.6
  Bottom Layer w15: R41.2 4209,6602.88 4210.4,6604.29 P41.0
NetP42_0: P42.0 R42.2 | length 81.4
  Bottom Layer w15: R42.2 4838,6602.88 4839.4,6604.29 P42.0
NetP43_0: P43.0 R43.2 | length 82.2
  Bottom Layer w15: R43.2 5468,6602.88 5469.4,6604.29 P43.0
NetP44_0: P44.0 R44.2 | length 83.1
  Bottom Layer w15: R44.2 6098,6602.88 6099.4,6604.29 P44.0
NetP45_0: P45.0 R45.2 | length 83.9
  Bottom Layer w15: R45.2 6727,6602.88 6728.4,6604.29 P45.0
NetP46_0: P46.0 R46.2 | length 84.7
  Bottom Layer w15: R46.2 7357,6602.88 7358.4,6604.29 P46.0
NetP47_0: P47.0 R47.2 | length 85.6
  Bottom Layer w15: R47.2 7986,6602.88 7987.4,6604.29 P47.0
NetP48_0: P48.0 R48.2 | length 105.7
  Top Layer w15: R48.2 3619.94,7180 3620,7180.06 P48.0
NetP49_0: P49.0 R49.2 | length 80.3
  Bottom Layer w15: R49.2 4209,7232.9 4209.67,7233.57 P49.0
NetP50_0: P50.0 R50.2 | length 81.1
  Bottom Layer w15: R50.2 4839,7232.9 4839.67,7233.57 P50.0
NetP51_0: P51.0 R51.2 | length 81.9
  Bottom Layer w15: R51.2 5468,7232.9 5468.67,7233.57 P51.0
NetP52_0: P52.0 R52.2 | length 82.8
  Bottom Layer w15: R52.2 6098,7232.9 6098.67,7233.57 P52.0
NetP53_0: P53.0 R53.2 | length 83.6
  Bottom Layer w15: R53.2 6727,7232.9 6727.67,7233.57 P53.0
NetP54_0: P54.0 R54.2 | length 84.4
  Bottom Layer w15: R54.2 7357,7232.9 7357.67,7233.57 P54.0
NetP55_0: P55.0 R55.2 | length 85.3
  Bottom Layer w15: R55.2 7987,7232.9 7987.67,7233.57 P55.0
NetP56_0: P56.0 R56.2 | length 107.9
  Top Layer w15: R56.2 3619.94,7808 3620,7808.06 P56.0
NetP57_0: P57.0 R57.2 | length 80
  Bottom Layer w15: R57.2 4209,7862.92 4209.06,7862.86 P57.0
NetP58_0: P58.0 R58.2 | length 80.9
  Bottom Layer w15: R58.2 4839,7862.92 4839.06,7862.86 P58.0
NetP59_0: P59.0 R59.2 | length 81.7
  Bottom Layer w15: R59.2 5469,7862.92 5469.06,7862.86 P59.0
NetP60_0: P60.0 R60.2 | length 82.5
  Bottom Layer w15: R60.2 6098,7862.92 6098.06,7862.86 P60.0
NetP61_0: P61.0 R61.2 | length 83.4
  Bottom Layer w15: R61.2 6728,7862.92 6728.06,7862.86 P61.0
NetP62_0: P62.0 R62.2 | length 84.2
  Bottom Layer w15: R62.2 7357,7862.92 7357.06,7862.86 P62.0
NetP63_0: P63.0 R63.2 | length 85
  Bottom Layer w15: R63.2 7987,7862.92 7987.06,7862.86 P63.0
NetR0_1: R0.1 U0.19 | length 550.7
  Bottom Layer w15: R0.1 3874.94,3320 3995,3320 U0.19
NetR1_1: R1.1 U0.18 | length 404.4
  Bottom Layer w15: R1.1 3870,3415 4055,3415 4095,3375 U0.18
NetR2_1: R2.1 U0.17 | length 388.2
  Bottom Layer w15: U0.17 4397.79,3452.79 R2.1
NetR3_1: R3.1 U0.16 | length 2349.5
  Bottom Layer w15: U0.16 4295,3225 4262.5,3225 4220,3182.5 4065.5,3182.5 4045,3203 4045,3366 4044,3367 3850,3367 3824,3393 3824,3642 3850,3668 4913.13,3668 R3.1
NetR4_1: R4.1 U0.15 | length 1542
  Top Layer w15: v1(5588.71,3284) R4.1
  Bottom Layer w15: U0.15 4395,3182.5 4838,3182.5 4939.5,3284 v1(5588.71,3284)
NetR5_1: R5.1 U0.14 | length 2034.2
  Bottom Layer w15: U0.14 4495,3350 4550,3405 6338.87,3405 R5.1
NetR6_1: R6.1 U0.13 | length 2548.8
  Bottom Layer w15: U0.13 4595,3325 4650,3380 6943.04,3380 R6.1
NetR7_1: R7.1 U0.12 | length 3077.9
  Bottom Layer w15: U0.12 4695,3325 4723,3353 7027,3353 7050,3376 7568.21,3376 R7.1
NetR8_1: R8.1 U1.19 | length 499.7
  Bottom Layer w15: R8.1 3657.8,3730 3925,3730 3995,3800 U1.19
NetR9_1: R9.1 U1.18 | length 372.2
  Bottom Layer w15: R9.1 3870,4045 4000,4045 4095,3950 U1.18
NetR10_1: R10.1 U1.17 | length 533.3
  Bottom Layer w15: U1.17 4195,3825 4208,3812 4325,3812 4338,3825 4338,3921.65 R10.1
NetR11_1: R11.1 U1.16 | length 1004.2
  Bottom Layer w15: U1.16 4295,3944.51 4492.49,4142 5069.15,4142 R11.1
NetR12_1: R12.1 U1.15 | length 2360.5
  Bottom Layer w15: U1.15 4395,3800 4366,3771 4181,3771 4152,3800 4152,3925 4175,3948 4231,3948 4437.5,4154.5 4437.5,4250 4465.5,4278 5562.31,4278 R12.1
NetR13_1: R13.1 U1.14 | length 2037.8
  Bottom Layer w15: U1.14 4495,3986 4546.75,4037.75 6341.61,4037.75 R13.1
NetR14_1: R14.1 U1.13 | length 2549.9
  Bottom Layer w15: U1.13 4595,3957 4650,4012 6945.02,4012 R14.1
NetR15_1: R15.1 U1.12 | length 3064.5
  Bottom Layer w15: U1.12 4695,3932 4750,3987 7549.19,3987 R15.1
NetR16_1: R16.1 U2.19 | length 489.2
  Bottom Layer w15: R16.1 3660.65,4360 3905,4360 3995,4450 U2.19
NetR17_1: R17.1 U2.18 | length 361.7
  Bottom Layer w15: R17.1 3907.83,4675 4020,4675 4095,4600 U2.18
NetR18_1: R18.1 U2.17 | length 530.7
  Bottom Layer w15: U2.17 4195,4459.5 4212.5,4442 4325,4442 4338,4455 4338,4551.66 R18.1
NetR19_1: R19.1 U2.16 | length 1014.4
  Bottom Layer w15: U2.16 4295,4592 4475,4772 5069.16,4772 R19.1
NetR20_1: R20.1 U2.15 | length 1612.4
  Top Layer w15: v1(5603.67,4559) R20.1
  Bottom Layer w15: U2.15 4395,4455.5 4412.5,4438 4725,4438 4738,4451 4738,4551 4765,4578 5584.67,4578 v1(5603.67,4559)
NetR21_1: R21.1 U2.14 | length 2037.8
  Bottom Layer w15: U2.14 4495,4616 4546.77,4667.77 6341.61,4667.77 R21.1
NetR22_1: R22.1 U2.13 | length 2550.4
  Bottom Layer w15: U2.13 4595,4587.77 4650,4642.77 6945.77,4642.77 R22.1
NetR23_1: R23.1 U2.12 | length 3064.9
  Bottom Layer w15: U2.12 4695,4562.77 4750,4617.77 7549.94,4617.77 R23.1
NetR24_1: R24.1 U3.19 | length 508
  Bottom Layer w15: R24.1 3663.51,4990 3935,4990 3995,5050 U3.19
NetR25_1: R25.1 U3.18 | length 395.6
  Bottom Layer w15: R25.1 3870,5305 4040,5305 4095,5250 U3.18
NetR26_1: R26.1 U3.17 | length 427
  Bottom Layer w15: U3.17 4195,5206.33 4331.52,5342.85 R26.1
NetR27_1: R27.1 U3.16 | length 1015.8
  Bottom Layer w15: U3.16 4295,5216 4351.79,5272.79 4569.23,5272.79 4684.44,5388 4836,5388 4856,5408 5063.18,5408 R27.1
NetR28_1: R28.1 U3.15 | length 2200.7
  Bottom Layer w15: U3.15 4395,5075 4370,5050 4277,5050 4252,5075 4252,5208.79 4341,5297.79 4529.51,5297.79 4544.23,5312.5 4544.23,5508.23 4575,5539 5561.35,5539 R28.1
NetR29_1: R29.1 U3.14 | length 2017.3
  Bottom Layer w15: U3.14 4495,5211 4525,5241 4592.44,5241 4647.44,5296 6339.82,5296 R29.1
NetR30_1: R30.1 U3.13 | length 2544.7
  Bottom Layer w15: U3.13 4595,5208 4650,5263 6935.99,5263 R30.1
NetR31_1: R31.1 U3.12 | length 3073.9
  Bottom Layer w15: U3.12 4695,5208 4725,5238 7540.15,5238 R31.1
NetR32_1: R32.1 U4.19 | length 497.4
  Bottom Layer w15: R32.1 3666.37,5620 3915,5620 3995,5700 U4.19
NetR33_1: R33.1 U4.18 | length 378.1
  Bottom Layer w15: R33.1 3870,5935 4010,5935 4095,5850 U4.18
NetR34_1: R34.1 U4.17 | length 530.8
  Bottom Layer w15: U4.17 4195,5719.5 4212.5,5702 4325,5702 4338,5715 4338,5811.7 R34.1
NetR35_1: R35.1 U4.16 | length 1014.4
  Bottom Layer w15: U4.16 4295,5852 4475,6032 5069.2,6032 R35.1
NetR36_1: R36.1 U4.15 | length 2386.4
  Bottom Layer w15: U4.15 4395,5700 4318,5623 4232,5623 4152,5703 4152,5825 4165,5838 4244,5838 4438,6032 4438,6131 4475,6168 5562.37,6168 R36.1
NetR37_1: R37.1 U4.14 | length 2043.1
  Bottom Layer w15: U4.14 4495,5885 4537.5,5927.5 6341.3,5927.5 R37.1
NetR38_1: R38.1 U4.13 | length 2551.7
  Bottom Layer w15: U4.13 4595,5850 4647,5902 6944.97,5902 R38.1
NetR39_1: R39.1 U4.12 | length 3064.5
  Bottom Layer w15: U4.12 4695,5822 4750,5877 7549.13,5877 R39.1
NetR40_1: R40.1 U5.19 | length 516.2
  Bottom Layer w15: R40.1 3669.22,6250 3945,6250 3995,6300 U5.19
NetR41_1: R41.1 U5.18 | length 389.8
  Bottom Layer w15: R41.1 3870,6565 4030,6565 4095,6500 U5.18
NetR42_1: R42.1 U5.17 | length 530.8
  Bottom Layer w15: U5.17 4195,6349.5 4212.5,6332 4325,6332 4338,6345 4338,6441.72 R42.1
NetR43_1: R43.1 U5.16 | length 1017.6
  Bottom Layer w15: U5.16 4295,6480.5 4462.5,6648 4836,6648 4855,6667 5064.22,6667 R43.1
NetR44_1: R44.1 U5.15 | length 2397.3
  Bottom Layer w15: U5.15 4395,6348 4300,6253 4232,6253 4152,6333 4152,6450 4170,6468 4243,6468 4438,6663 4438,6764 4500,6826 4821,6826 4861,6786 5574.38,6786 R44.1
NetR45_1: R45.1 U5.14 | length 2035.3
  Bottom Layer w15: U5.14 4495,6501.79 4550,6556.79 6340.57,6556.79 R45.1
NetR46_1: R46.1 U5.13 | length 2549.9
  Bottom Layer w15: U5.13 4595,6476.79 4650,6531.79 6944.74,6531.79 R46.1
NetR47_1: R47.1 U5.12 | length 3063.9
  Bottom Layer w15: U5.12 4695,6451 4750,6506 7548.12,6506 R47.1
NetR48_1: R48.1 U6.19 | length 505.7
  Bottom Layer w15: R48.1 3672.08,6880 3925,6880 3995,6950 U6.19
NetR49_1: R49.1 U6.18 | length 372.3
  Bottom Layer w15: R49.1 3870,7195 4000,7195 4095,7100 U6.18
NetR50_1: R50.1 U6.17 | length 533.4
  Bottom Layer w15: U6.17 4195,6975 4208,6962 4325,6962 4338,6975 4338,7071.74 R50.1
NetR51_1: R51.1 U6.16 | length 1007.4
  Bottom Layer w15: U6.16 4295,7093 4480,7278 4836,7278 4855,7297 5064.24,7297 R51.1
NetR52_1: R52.1 U6.15 | length 2280.1
  Top Layer w15: U6.15 4395,7142 4367,7170 4367,7289 4338,7318 4338,7492 4438,7592 4438,7701 4475,7738 5252.4,7738 R52.1
NetR53_1: R53.1 U6.14 | length 2034.9
  Bottom Layer w15: U6.14 4495,7131.07 4550,7186.07 6339.84,7186.07 R53.1
NetR54_1: R54.1 U6.13 | length 2549.4
  Bottom Layer w15: U6.13 4595,7106.07 4650,7161.07 6503.07,7161.07 6514,7172 6954.93,7172 R54.1
NetR55_1: R55.1 U6.12 | length 3063.9
  Bottom Layer w15: U6.12 4695,7081 4750,7136 7548.1,7136 R55.1
NetR56_1: R56.1 U7.19 | length 495.1
  Bottom Layer w15: R56.1 3674.94,7510 3905,7510 3995,7600 U7.19
NetR57_1: R57.1 U7.18 | length 391.1
  Bottom Layer w15: R57.1 4032.08,7862.92 4095,7800 U7.18
NetR58_1: R58.1 U7.17 | length 388.2
  Bottom Layer w15: U7.17 4397.92,7862.92 R58.1
NetR59_1: R59.1 U7.16 | length 950.8
  Top Layer w15: U7.16 4295,7717 4350,7772 5037.41,7772 R59.1
NetR60_1: R60.1 U7.15 | length 1446.6
  Bottom Layer w15: U7.15 4550.36,7815.36 5558,7815.36 5605.56,7862.92 R60.1
NetR61_1: R61.1 U7.14 | length 2867.5
  Bottom Layer w15: U7.14 4495,7592 4172.5,7592 4152,7612.5 4152,7726 4200,7774 4257,7774 4398,7915 6334.59,7915 R61.1
NetR62_1: R62.1 U7.13 | length 2549
  Bottom Layer w15: U7.13 4595,7735.36 4650,7790.36 6943.27,7790.36 R62.1
NetR63_1: R63.1 U7.12 | length 3063.6
  Bottom Layer w15: U7.12 4695,7710.36 4750,7765.36 7547.44,7765.36 R63.1
P00: JP3.2 RP0.1 U0.2 U1.2 U2.2 U3.2 U4.2 U5.2 U6.2 U7.2 U9.39 | length 5075.2
  Top Layer w15: U9.39 3995,2604 3993.94,2605.06 JP3.2 3993.94,2744 3995,2745.06 RP0.1 U0.2 3995,3100 4038,3143 4038,3415 3995,3458 U1.2 3995,3730 4038,3773 4038,4045 3995,4088 U2.2 3995,4360 4038,4403 4038,4675 3995,4718 U3.2 3995,4947 4038,4990 4038,5262 3995,5305 U4.2 3995,5620 4038,5663 4038,5935 3995,5978 U5.2 3995,6250 4038,6293 4038,6565 3995,6608 U6.2 3995,6880 4038,6923 4038,7195 3995,7238 U7.2
P01: JP3.3 RP0.2 U0.3 U1.3 U2.3 U3.3 U4.3 U5.3 U6.3 U7.3 U9.38 | length 5075.2
  Top Layer w15: U9.38 4095,2604 4093.94,2605.06 JP3.3 4093.94,2744 4095,2745.06 RP0.2 U0.3 4095,3100 4138,3143 4138,3415 4095,3458 U1.3 4095,3730 4138,3773 4138,4045 4095,4088 U2.3 4095,4360 4138,4403 4138,4675 4095,4718 U3.3 4095,4947 4138,4990 4138,5262 4095,5305 U4.3 4095,5620 4138,5663 4138,5935 4095,5978 U5.3 4095,6250 4138,6293 4138,6565 4095,6608 U6.3 4095,6880 4138,6923 4138,7195 4095,7238 U7.3
P02: JP3.4 RP0.3 U0.4 U1.4 U2.4 U3.4 U4.4 U5.4 U6.4 U7.4 U9.37 | length 5650.5
  Top Layer w15: U9.37 4195,2604 4193.94,2605.06 JP3.4 4193.94,2744 4195,2745.06 RP0.3 U0.4 4195,3132 4245,3182 4245,3362 4298,3415 4298,3475 4272.64,3500.36 4212.5,3500.36 4195,3517.86 U1.4 4195,3730 4245,3780 4245,3994 4298,4047 4298,4112.5 4275.86,4134.64 4210.36,4134.64 4195,4150 U2.4 4195,4417 4245,4467 4245,4623 4298,4676 4298,4750 4284.07,4763.93 4212.5,4763.93 4195,4781.43 U3.4 ; U4.4 4195,5620 4238,5663 4238,5873 4298,5933 4298,6000 4275.5,6022.5 4210,6022.5 4195,6037.5 U5.4 4195,6282 4245,6332 4245,6512 4298,6565 4298,6625 4271.21,6651.79 4212.5,6651.79 4195,6669.29 U6.4 4195,6880 4245,6930 4245,7142 4298,7195 4298,7262.5 4279.43,7281.07 4212.5,7281.07 4195,7298.57 U7.4
  Bottom Layer w15: U3.4 4195,4990 4145,5040 4145,5228 4124,5249 4124,5385 4150,5411 4195,5411 U4.4
P03: JP3.5 RP0.4 U0.5 U1.5 U2.5 U3.5 U4.5 U5.5 U6.5 U7.5 U9.36 | length 5077.7
  Top Layer w15: U9.36 4295,2604 4293.94,2605.06 JP3.5 4293.94,2744 4295,2745.06 RP0.4 U0.5 4295,3100 4338,3143 4338,3482.36 4295,3525.36 U1.5 4295,3774 4338,3817 4338,4116.64 4295,4159.64 U2.5 4295,4404 4338,4447 4338,4745.93 4295,4788.93 U3.5 4295,4947 4252,4990 4252,5190 4298,5236 4298,5358 4295,5361 U4.5 4295,5676 4338,5719 4338,6004.5 4295,6047.5 U5.5 4295,6250 4338,6293 4338,6633.79 4295,6676.79 U6.5 4295,6929 4338,6972 4338,7263.07 4295,7306.07 U7.5
P04: JP3.6 RP0.5 U0.6 U1.6 U2.6 U3.6 U4.6 U5.6 U6.6 U7.6 U9.35 | length 5075.2
  Top Layer w15: U9.35 4395,2604 4393.94,2605.06 JP3.6 4393.94,2744 4395,2745.06 RP0.5 U0.6 4395,3100 4438,3143 4438,3382.73 4395,3425.73 U1.6 4395,3730 4438,3773 4438,4045 4395,4088 U2.6 4395,4360 4438,4403 4438,4675 4395,4718 U3.6 4395,4947 4438,4990 4438,5283 4395,5326 U4.6 4395,5620 4438,5663 4438,5902.81 4395,5945.81 U5.6 4395,6250 4438,6293 4438,6532.82 4395,6575.82 U6.6 4395,6880 4438,6923 4438,7162.84 4395,7205.84 U7.6
P05: JP3.7 RP0.6 U0.7 U1.7 U2.7 U3.7 U4.7 U5.7 U6.7 U7.7 U9.34 | length 5369.4
  Top Layer w15: U9.34 4495,2604 4493.94,2605.06 JP3.7 4493.94,2744 4495,2745.06 RP0.6 U0.7 4495,3100 4538,3143 4538,3341 4454,3425 4454,3555 4495,3555 U1.7 4495,3680 4545,3730 4545,4135 4495,4185 U2.7 4495,4404 4545,4454 4545,4731 4495,4781 U3.7 4495,4990 4538,5033 4538,5228.5 4454,5312.5 4454,5445 4495,5445 U4.7 4495,5620 4538,5663 4538,5864 4454,5948 4454,6062.5 4466.5,6075 4495,6075 U5.7 4495,6250 4538,6293 4538,6491 4454,6575 4454,6705 4495,6705 U6.7 4495,6880 4538,6923 4538,7116 4454,7200 4454,7335 4495,7335 U7.7
P06: JP3.8 RP0.7 U0.8 U1.8 U2.8 U3.8 U4.8 U5.8 U6.8 U7.8 U9.33 | length 5075.2
  Top Layer w15: U9.33 4595,2604 4593.94,2605.06 JP3.8 4593.94,2744 4595,2745.06 RP0.7 U0.8 4595,3100 4638,3143 4638,3415 4595,3458 U1.8 4595,3730 4638,3773 4638,4045 4595,4088 U2.8 4595,4360 4638,4403 4638,4675 4595,4718 U3.8 4595,4947 4638,4990 4638,5262 4595,5305 U4.8 4595,5620 4638,5663 4638,5935 4595,5978 U5.8 4595,6250 4638,6293 4638,6565 4595,6608 U6.8 4595,6880 4638,6923 4638,7195 4595,7238 U7.8
P07: JP3.9 RP0.8 U0.9 U1.9 U2.9 U3.9 U4.9 U5.9 U6.9 U7.9 U9.32 | length 5075.2
  Top Layer w15: U9.32 4695,2604 4693.94,2605.06 JP3.9 4693.94,2744 4695,2745.06 RP0.8 U0.9 4695,3100 4738,3143 4738,3388.95 4695,3431.95 U1.9 4695,3730 4738,3773 4738,4007.75 4695,4050.75 U2.9 4695,4360 4738,4403 4738,4637.77 4695,4680.77 U3.9 4695,4947 4738,4990 4738,5283 4695,5326 U4.9 4695,5620 4738,5663 4738,5935 4695,5978 U5.9 4695,6250 4738,6293 4738,6527.82 4695,6570.82 U6.9 4695,6880 4738,6923 4738,7157.84 4695,7200.84 U7.9
P10: JP2.1 U8.1 U9.1 | length 4420.4
  Top Layer w15: JP2.1 U9.1
  Bottom Layer w15: U9.1 3895,1884.5 3912.5,1867 4925,1867 4938,1880 4938,2011 4976,2049 5455,2049 5539,2133 5981,2133 5998,2150 5998,2312.5 5975.5,2335 5902,2335 5902,2650 5979,2727 7185,2727 U8.1
P11: JP2.2 U8.2 U9.2 | length 4725.7
  Top Layer w15: JP2.2 U9.2
  Bottom Layer w15: JP2.2 4051,1734 7299,1734 7508,1943 7508,2561 7450,2619 7350,2619 7285,2684 U8.2
P12: JP2.3 U8.3 U9.3 | length 4165.4
  Top Layer w15: JP2.3 U9.3
  Bottom Layer w15: U9.3 4095,2250 4145,2300 5570,2300 5738,2468 5738,2575 5772,2609 5800,2609 6014,2823 6414,2823 6472,2765 7036,2765 7090,2819 7385,2819 U8.3
P13: JP2.4 U8.4 U9.4 | length 4848
  Top Layer w15: U9.4 JP2.4 4342.03,1642.97 6043.97,1642.97 6764,2363 6764,3150 6780,3166 6979,3166 7198,2947 7438,2947 7485,2900 U8.4
P14: JP2.5 U8.5 U9.5 | length 5251.5
  Top Layer w15: U9.5 JP2.5 4417.03,1667.97 5950.97,1667.97 6591,2308 6591,3226 6738,3373 7412.5,3373 7433,3352.5 7433,2997 7585,2845 U8.5
P15: JP2.6 U8.6 U9.6 | length 5403.1
  Top Layer w15: JP2.6 U9.6
  Bottom Layer w15: JP2.6 4347,1838 3975,1838 3947,1810 3947,1747 3985,1709 7550,1709 7685,1844 U8.6
P16: JP2.7 U8.7 U9.7 | length 6169.8
  Top Layer w15: JP2.7 U9.7 4495,2002 4450,2047 4199,2047 4147,1995 4147,1701 4232,1616 7656,1616 8110,2070 8110,2325 ; U8.7 7785,2825 8003,2825 8110,2718 8110,2328
P17: JP2.8 U8.8 U9.8 | length 6963.7
  Top Layer w15: JP2.8 U9.8 4595,2000 4511,2084 4100,2084 4047,2031 4047,1743 4199,1591 7701,1591 8155,2045 8155,2723 8028,2850 7767,2850 7742,2825 7742,2699.5 7762.5,2679 7885,2679 U8.8
P20: JP3.20 U0.11 U9.21 | length 3513.1
  Top Layer w15: U0.11 4795,3100 4752,3057 4752,2900 4946,2706 4946,1771 4999.03,1717.97 5829.97,1717.97 5900,1788 5900,1984 5795,2089 U9.21 5795,2604 5793.94,2605.06 JP3.20
P21: JP3.19 U1.11 U9.22 | length 4480.7
  Top Layer w15: JP3.19 5693.94,2605.06 5695,2604 U9.22
  Bottom Layer w15: U1.11 4795,3723 4766,3694 3769,3694 3732,3657 3732,3403 3574,3245 3574,3018 3848,2744 5601,2744 5695,2650 U9.22
P22: JP3.18 U2.11 U9.23 | length 5067.4
  Top Layer w15: JP3.18 5593.94,2605.06 5595,2604 U9.23
  Bottom Layer w15: U2.11 4795,4400 4710,4315 3748,4315 3549,4116 3549,2884 3828,2605 5577.5,2605 5595,2587.5 U9.23
P23: JP3.17 U3.11 U9.24 | length 5758.7
  Top Layer w15: JP3.17 5493.94,2605.06 5495,2604 U9.24
  Bottom Layer w15: U3.11 4795,5050 4735,4990 4500,4990 4442,4932 4442,4790 4424,4772 3717,4772 3668,4723 3668,4527 3524,4383 3524,2772 3842,2454 5475,2454 5495,2474 U9.24
P24: JP3.16 U4.11 U9.25 | length 3636.4
  Top Layer w15: v1(5111,5620) 5363,5368 5363,2705.94 JP3.16 5393.94,2605.06 5395,2604 U9.25
  Bottom Layer w15: U4.11 4795,5675 4850,5620 v1(5111,5620)
P25: JP3.15 U5.11 U9.26 | length 4934
  Top Layer w15: JP3.15 5293.94,2605.06 5295,2604 U9.26 5295,2484.5 5312.5,2467 5438,2467 5441,2470 5441,2814 5447,2820 5447,3240 5558,3351 5558,6039 v1(5347,6250)
  Bottom Layer w15: U5.11 4795,6300 4845,6250 v1(5347,6250)
P26: JP3.14 U6.11 U9.27 | length 5081.2
  Top Layer w15: v1(5004,6829) 5004,2944 5045,2903 5045,2474 5052,2467 5195,2467 U9.27 5195,2604 5193.94,2605.06 JP3.14
  Bottom Layer w15: U6.11 4795,6935 4850,6880 4953,6880 v1(5004,6829)
P27: JP3.13 U7.11 U9.28 | length 5249.3
  Top Layer w15: U7.11 4795,7510 5068,7237 5068,3133 5093.94,3107.06 JP3.13 5093.94,2605.06 5095,2604 U9.28
RST: C2.2 JP2.9 R64.2 U9.9 | length 3341.1
  Top Layer w15: U9.9 JP2.9 4743,1742 4918,1742 4967.03,1692.97 5847.97,1692.97 6431,2276 6431,3209 R64.2
  Bottom Layer w15: C2.2 6240,3255 R64.2
RXD: JP1.2 JP2.10 U9.10 | length 1593.2
  Top Layer w15: JP2.10 U9.10
  Bottom Layer w15: U9.10 4795,2188 4850,2243 5908,2243 JP1.2
TXD: JP1.3 JP2.11 U9.11 | length 1417.8
  Top Layer w15: JP2.11 U9.11
  Bottom Layer w15: U9.11 4895,2130 4950,2185 JP1.3
VCC: C2.1 C3.1 JP1.1 JP3.1 K0.C K1.C K2.2 RP0.0 RP1.0 U0.20 U1.20 U2.20 U3.20 U4.20 U5.20 U6.20 U7.20 U8.10 U9.40 | length 12609
  Top Layer w20: U9.40 3895,2604 3893.94,2605.06 JP3.1 3893.94,2744 3895,2745.06 RP0.0 3940,2860 3940,3100 3895,3145 U0.20 3895,3405 3918,3428 3918,3475 3888,3505 3862.5,3505 3850,3517.5 3850,3730 3895,3775 U1.20 3895,4035 3918,4058 3918,4117 3900,4135 3862.5,4135 3850,4147.5 3850,4313 3895,4358 U2.20 3895,4589 3918,4612 3918,4752 3900,4770 3850,4770 3850,4910 3895,4955 U3.20 3895,5260.44 3917.56,5283 3917.56,5375 3902.15,5390.41 3862.5,5390.41 3850,5402.91 3850,5540 3895,5585 U4.20 3895,5925 3917.56,5947.56 3917.56,6002.87 3900,6020.43 3862.5,6020.43 3850,6032.93 3850,6293 3895,6338 U5.20 3895,6555 3917.56,6577.56 3917.56,6625 3892.12,6650.44 3862.5,6650.44 3850,6662.94 3850,6818 3895,6863 U6.20 3895,7132 3822,7205 3822,7430 3895,7503 U7.20 ; JP1.1 6090,2525 K1.C 6215,2900 C2.1 6080,3265 K0.C
  Bottom Layer w20: U0.20 3895,3197.5 3937.5,3155 4905,3155 4963,3213 5983,3213 K0.C ; JP1.1 6895,2385 C3.1 7163,2335 K2.2 ; C2.1 6268,3077 6433,3077 6681,3325 RP1.0 7153,3257 7928,3257 7985,3200 U8.10
XTAL1: C0.2 JP2.19 U9.19 Y0.2 | length 1726.7
  Top Layer w15: Y0.2 5546,2911 5546,1767 5570.03,1742.97 5647.97,1742.97 JP2.19 U9.19
  Bottom Layer w15: C0.2 Y0.2
XTAL2: C1.2 JP2.18 U9.18 Y0.1 | length 1599.8
  Top Layer w15: JP2.18 U9.18 5595,2249 5643,2297 5643,3112 Y0.1
  Bottom Layer w15: C1.2 Y0.1
pads on no net: K0.A K0.B K1.A K1.D K2.3 K2.4 K2.5 K2.6 K3.A K3.D K4.A K4.D PORT0.0 PORT0.2 PORT0.3 PORT0.4 Y0.0

## Polygon pours and split planes (outlines as drawn)
GND on Top Layer "Button Layer-No Net" (solid, pour order 10): 8460,8445 8460,1170 3235,1170 3225,1160 3225,8435 3235,8445
GND on Bottom Layer "Button Layer-No Net" (solid, pour order 16): 3220,8450 8460,8450 8470,8440 8470,1160 3220,1160

## Silkscreen, mask and mechanical layers (free items; w line width, h text height)
Mechanical 1:
  circle w10: c8225,1410 r60
  circle w10: c3465,1410 r60
  circle w10: c8225,8205 r60
  circle w10: c3465,8205 r60
  lines w10: 3225,1170 8465,1170 8465,8445 3225,8445 3225,1170

## Text inside footprints (layer, text, board x,y; h text height)
JP1: Top Overlay "GND" at 6060,2055 h60; Top Overlay "TXD" at 6060,2155 h60; Top Overlay "RXD" at 6060,2255 h60; Top Overlay "VCC" at 6060,2355 h60
PORT0: Top Overlay "V++" at 7830,2205 h60 r180; Top Overlay "D-" at 7830,2285 h60 r180; Top Overlay "D+" at 7830,2365 h60 r180; Top Overlay "ID" at 7830,2445 h60 r180; Top Overlay "GND" at 7830,2525 h60 r180